# Altium PCB opo_v4.1.PcbDoc (part 2 of 2)
Units mil, origin at the board's own origin, x right, y up, seen from the top; angles counter-clockwise.
Board outline 1250 x 1250 mil, 6 copper layers (Top Layer, GND, Mid-Layer 3, Mid-Layer 4, VCC, Bottom Layer), stack 72.01 mil thick; 106 components, 83 nets, 445 pads, 226 vias.
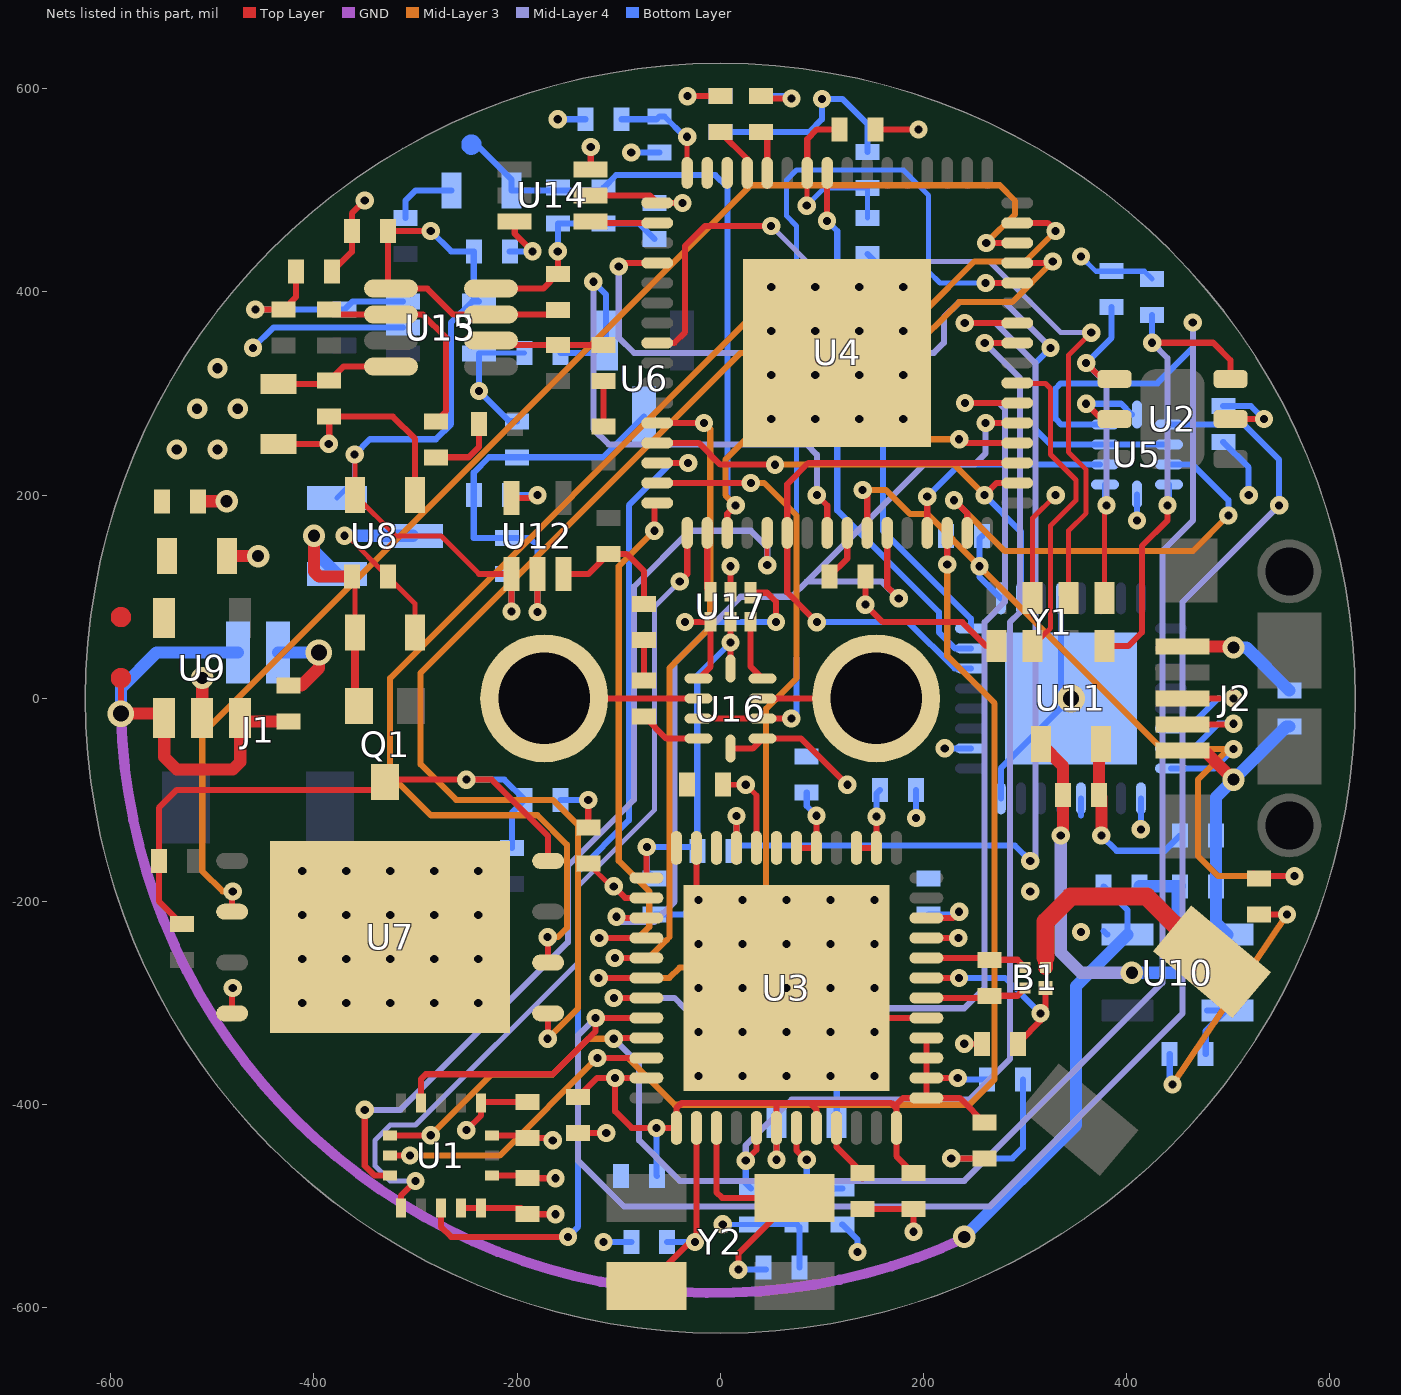
[diagram p6: the nets of this part, all layers, seen from the top]

## Via types
v1: diameter 18, hole 8, Top Layer to Bottom Layer, 149 vias
v2: diameter 19.68, hole 8.07, Top Layer to Bottom Layer, 61 vias
v3: diameter 22, hole 12, Top Layer to Bottom Layer, 8 vias
v4: diameter 20, hole 10, Top Layer to Bottom Layer, 5 vias
v5: diameter 26, hole 16, Top Layer to Bottom Layer, 2 vias
v6: diameter 27.56, hole 15.75, Top Layer to Bottom Layer, tented top, 1 vias

## Nets (pads, with @x,y where several pads share a name; then routed paths per layer and width w, separated by ;. In a path a pad name is that pad's centre, name@x,y a point inside that pad or via, vN(x,y) a via of type N, cw(c..) or ccw(c..) an arc to the next point about the centre after c; other vN are vias at no path point) (continued)
GND: C1.2 C2.2 C3.2 C4.2 C5.2 C6.2 C7.2 C8.2 C9.2 C10.2 C11.2 C12.2 C13.2 C14.2 C15.2 C16.2 C17.2 C18.2 C19.1 C20.1 C21.2 C22.2 C23.2 C24.2 C25.2 C26.2 C27.2 C28.2 C29.2 C30.2 C31.2 C32.2 C33.2 C34.2 C35.2 C39.2 C40.2 C41.2 C42.2 C43.2 C44.2 C45.2 C46.2 C47.2 J1.1 J2.5 R5.1 R9.2 R25.2 R26.2 U1.12 U1.13 U1.16 U2.2 U3.5 U3.9 U3.19 U3.22 U3.23 U3.24 U3.49 U4.62 U4.63 U4.65 U5.10 U6.3 U7.4 U7.9 U8.3 U9.2 U10.2 U11.4 U11.17 U11.20 U11.24 U11.26 U11.33 U12.2 U13.4 U14.3 U14.6 U15.2 U16.1 U16.10 U17.2 Y1.3 | length 4149.4
  Top Layer w5: v1(-370,160) -367.28,160 C25.2@-327.28,120 -300.47,93.19 C24.2@-300.47,65 ; Y1.3@307.28,98.62 307.28,177.28 v1(330,200)
  Top Layer w6: U7.4@-480.51,-310 -480.51,-285.51 v1(-480,-285) ; C41.2@-435,250.47 v1(-385.47,250.47) -385,250.94 C40.2@-385,277.28 -322.28,277.28 -300.47,255.47 C26.2@-300.47,200 ; R25.2@-382.28,420 -362.72,439.57 C45.2@-362.72,460 -362.72,477.28 v1(-350,490) ; U1.12@-255.31,-501.67 U1.13@-235.62,-501.67 C2.2@-196.04,-501.67 ; U13.4@-225.79,403.39 -174.33,403.39 C44.2@-160,417.72 v1(-160,440) ; U1.16@-224.8,-430.31 C1.2@-192.41,-430.31 ; U14.6@-202.4,469.41 -202.4,457.4 v1(-185,440) ; C2.2@-190,-507.72 v1(-162.28,-507.72) ; C1.2@-190,-432.72 -167.28,-432.72 v1(-165,-435) ; v1(-180,85) U12.2@-180,122.6 ; C10.2@-145,-432.72 C10.2@-140,-427.72 v1(-112.28,-427.72) ; C9.2@-130,-127.28 v1(-130,-100) ; U14.3@-127.6,520.59 v1(-127.6,542.6) ; U3.23@-23.58,-147.2 -23.58,-196.42 v2(-21.61,-198.39) v2(21.69,-241.69) v2(65,-285) 94.53,-314.53 U3.5@202.8,-314.53 ; U16.10@10,-49.37 31.65,-49.37 U16.1@41.5,-39.53 79.53,-39.53 v1(125,-85) ; U17.2@10,104.76 v1(10,130) ; R5.1@140,-502.72 C17.2@190,-502.72 v1(190,-525) ; C21.2@152.72,560 v1(195,560) ; U3.9@202.8,-235.79 v1(234.21,-235.79) ; v1(227.28,-452.72) C18.2@260,-452.72 ; v1(240,-340) C22.2@257.28,-340 C22.2@257.28,-337.28 ; C32.2@310.47,-45 C32.2@312.97,-47.5 ; v1(360,290) 375,275 U2.2@387.91,275
  Top Layer w12: C29.2@-514.13,194 v3(-486,194) ; U9.2@-510,-19.21 v3(-510,20) ; C28.2@-485.47,140 v3(-455,140) ; C27.2@-425,12.72 -412.28,12.72 -395.12,29.88 v5(-395.12,45.12) ; C32.2@315.47,-45 337.28,-66.81 C34.2@337.28,-95 337.28,-132.72 v1(335,-135) ; J2.5@454.68,51.18 503.82,51.18 v3(505,50)
  Mid-Layer 4 w12: v1(335,-135) 335,-250 355,-270 v3(405,-270)
  Bottom Layer w5: v1(2.28,-517.72) R9.2@30,-517.72 C7.2@75,-517.72
  Bottom Layer w6: v3@-510.32,19.68 v3(-510,20) ; v1(-460,345) -440,365 U15.2@-312.4,365 ; C46.2@-207.28,440 v1(-185,440) ; v1(-180,85) -180,150 -187.72,157.72 C39.2@-210,157.72 -242.72,157.72 C42.2@-242.72,200 -242.72,222.28 -227.72,237.28 C43.2@-200,237.28 -115.31,237.28 U6.3@-75,277.6 ; v1(-160,440) C47.2@-160,467.28 R26.2@-115,467.28 -80,467.28 C4.2@-65,452.28 ; C23.2@-157.28,-100 v1(-130,-100) ; v1(-115,-535) C20.1@-87.72,-535 ; v1(-87.72,537.28) C5.2@-60,537.28 ; C6.2@-65,-212.72 -35.94,-212.72 v2(-21.61,-198.39) ; C7.2@75,-517.72 77.72,-520.43 C19.1@77.72,-560 ; v2(108.31,-371.61) 114.53,-377.83 C8.2@114.53,-415 ; v1(192.72,-117.72) C15.2@192.72,-90 ; v1(220.79,-49.21) U11.26@246.57,-49.21 ; v1(227.28,-452.72) 287.28,-452.72 297.72,-442.28 C13.2@297.72,-375 ; U11.24@276.1,-98.43 276.1,-68.9 v6(345,0) ; U11.33@335.16,9.84 U11.4@335.16,98.43 ; 354.84,-115.16 U11.20@354.84,-98.43 ; v1(360,290) 394.37,290 405,279.37 ; v1(413.9,-128.9) U11.17@413.9,-98.43 ; C3.2@495,252.28 520,227.28 v1(520,200)
  Bottom Layer w12: J1.1@-435.32,45.12 v5(-395.12,45.12) ; v1(-370,160) U8.3@-302.6,160 ; v3(405,-270) 465,-270 ; C31.2@412.72,-185 C30.2@452.28,-185 450,-187.28 450,-255 465,-270 ; U10.2@499.21,-270 465,-270 ; v3(505,50) 517.72,50 C33.2@560,7.72
  other v1: 355,-230 305,-190
  other v2: -21.61,-371.61 21.69,-371.61 65,-371.61 151.61,-371.61 -21.61,-328.31 21.69,-328.31 65,-328.31 108.31,-328.31 151.61,-328.31 -411.61,-299.96 -368.31,-299.96 -325,-299.96 -281.69,-299.96 -238.39,-299.96 -21.61,-285 21.69,-285 108.31,-285 151.61,-285 -411.61,-256.65 -368.31,-256.65 -325,-256.65 -281.69,-256.65 -238.39,-256.65 -21.61,-241.69 65,-241.69 108.31,-241.69 151.61,-241.69 -411.61,-213.35 -368.31,-213.35 -325,-213.35 -281.69,-213.35 -238.39,-213.35 21.69,-198.39 65,-198.39 108.31,-198.39 151.61,-198.39 -411.61,-170.04 -368.31,-170.04 -325,-170.04 -281.69,-170.04 -238.39,-170.04 50.04,275.04 93.35,275.04 136.65,275.04 179.96,275.04 50.04,318.35 93.35,318.35 136.65,318.35 179.96,318.35 50.04,361.65 93.35,361.65 136.65,361.65 179.96,361.65 50.04,404.96 93.35,404.96 136.65,404.96 179.96,404.96
I2C/SPI: U4.4 U5.2 U5.8 | length 813.5
  Top Layer w6: v1(-100,425) -96.42,428.58 U4.4@-62.17,428.58
  Mid-Layer 4 w6: v1(-100,425) -100,355 -85,340 210,340 220,350 220,375 235,390 280,390 v1(325,345)
  Bottom Layer w6: v1(325,345) 310,330 310,265 325.16,249.84 373.5,249.84 U5.2@436.5,249.84
INTEGRATOR: C47.1 D4.2 R26.1 U4.19 U4.36 | length 1007.4
  Top Layer w6: U4.19@6.73,162.83 6.73,181.73 v1(15,190) ; v1(235,255) 238.58,251.42 U4.36@292.17,251.42
  Mid-Layer 3 w6: v1(15,190) 5,200 5,235 25,255 v1(235,255)
  Bottom Layer w6: -240,545 -205.47,510.47 D4.2@-205.47,500 -117.72,500 R26.1@-115,502.72 -102.72,515 -5,515 7,503 7,198 v1(15,190)
  Bottom Layer w10: -240,545 ccw(c-245,545) -240,545
MISO0: U1.7 U3.34 U4.30 | length 1270
  Top Layer w6: U1.7@-325.2,-450 v1(-305.48,-450) ; v1(-121.1,-353.9) U3.34@-72.8,-353.9 ; v1(223.27,131.73) U4.30@223.27,162.83
  Mid-Layer 3 w6: v1(-305.48,-450) -217.2,-450 v1(-121.1,-353.9) -91.1,-353.9 -45,-400 245,-400 270,-375 270,-5 223.27,41.73 v1(223.27,131.73)
MISO1: U4.46 U7.2 | length 1307.3
  Top Layer w6: U7.2@-480.51,-210 -480.51,-190.51 v1(-480,-190) ; v1(261.73,448.27) U4.46@292.17,448.27
  Mid-Layer 3 w6: v1(-480,-190) -490,-190 -510,-170 -510,-35 30,505 275,505 290,490 290,476.54 v1(261.73,448.27)
MOSI0: U4.29 U5.7 | length 218.7
  Top Layer w6: U4.29@203.58,162.83 v1(203.58,198.58)
  Bottom Layer w6: v1(203.58,198.58) 235.16,230.16 U5.7@373.5,230.16
MOSI0_MUX: U1.6 U3.33 U5.9 | length 1934.7
  Top Layer w6: U1.6@-325.2,-430.31 -285.31,-430.31 v1(-285,-430) ; v1(-105,-335) -104.21,-334.21 U3.33@-72.8,-334.21
  Mid-Layer 3 w6: v1(-285,-430) -225,-370 -165,-370 -130,-335 v1(-105,-335)
  Mid-Layer 4 w6: v1(-105,-335) -80,-360 -80,-435 -40,-475 240,-475 435,-280 435,145 465,175 v1(465,370)
  Bottom Layer w6: U5.9@378.5,269.53 335.47,269.53 330,275 330,305 335,310 430,310 465,345 v1(465,370)
MOSI1: U4.45 U7.5 | length 1345.8
  Top Layer w6: v1(-170,-335) -169.49,-334.49 U7.5@-169.49,-310 ; U4.45@292.17,428.58 328.58,428.58 v1(327.17,430)
  Mid-Layer 3 w6: v1(-170,-335) -140,-305 -140,-125 -165,-100 -260,-100 -295,-65 -295,25 20,340 185,340 235,390 287.17,390 v1(327.17,430)
NetANT1_1: ANT1.1 B1.2 | length 253.8
  Top Layer w15: 320,-255 320.04,-255.04 B1.2@320.04,-264.96
  Top Layer w18.11: 320,-255 320,-220 345,-195 419.49,-195 ANT1.1@483.74,-259.26 ANT1.1@478,-265
NetC5_1: C5.1 FB1.2 U4.64 | length 109.6
  Top Layer w5: v1(-32.72,552.72) -32.64,552.64 U4.64@-32.64,517.17
  Bottom Layer w6: FB1.2@-97.28,570 -62.72,570 C5.1@-60,572.72 -55,572.72 -35,552.72 v1(-32.72,552.72)
NetC19_2: C19.2 U3.39 Y2.1 | length 251.4
  Top Layer w6: U3.39@-3.9,-434.49 -3.9,-486.1 1.69,-491.69 Y2.1@72.83,-491.69 17.72,-546.81 v1(17.72,-562.28)
  Bottom Layer w6: v1(17.72,-562.28) C19.2@45,-562.28
NetC20_2: C20.2 U3.38 Y2.3 | length 194.2
  Top Layer w6: Y2.3@-72.83,-578.31 -29.53,-535 v1(-25,-535) -23.58,-533.58 U3.38@-23.58,-434.49
  Bottom Layer w6: C20.2@-52.28,-535 v1(-25,-535)
NetC21_1: C21.1 R8.2 R10.2 U4.58 | length 198.2
  Top Layer w5: v1(85,485) 85.47,485.47 U4.58@85.47,517.17
  Top Layer w6: U4.58@85.47,517.17 85.47,550.47 95,560 C21.1@117.28,560
  Bottom Layer w5: v1(85,485) 102.28,502.28 R10.2@145,502.28 R8.2@145,472.72
NetC36_2: C36.2 R17.1 | length 69.1
  Top Layer w6: R17.1@-280,237.28 -247.72,237.28 -237.72,247.28 C36.2@-237.72,270
NetC37_2: C37.2 R19.1 | length 39.6
  Top Layer w6: C37.2@-75,17.72 R19.1@-75,57.28
NetC38_2: C38.2 R21.1 | length 44.6
  Top Layer w6: C38.2@-115,267.72 R21.1@-115,312.28
NetD1_1: D1.1 R6.1 | length 66.9
  Top Layer w6: D1.1@40,592.72 42.28,590.43 v1(70,590.43)
  Bottom Layer w6: R6.1@40,592.72 72.28,592.72 v1(70,590.43) v1@70,590
NetD1_2: D1.2 U4.60 | length 42.6
  Top Layer w6: D1.2@40,557.28 46.1,551.18 U4.60@46.1,517.17
NetD2_1: D2.1 R7.1 | length 64.6
  Top Layer w6: v1(-32.28,592.72) D2.1@0,592.72
  Bottom Layer w6: v1(-32.28,592.72) R7.1@0,592.72
NetD2_2: D2.2 U4.61 | length 51.1
  Top Layer w6: D2.2@0,557.28 26.42,530.87 U4.61@26.42,517.17
NetD3_2: D3.2 R15.1 | length 265.4
  Top Layer w6: D3.2@530,-212.72 v1(557.72,-212.72)
  Mid-Layer 3 w6: v1(445,-380) v1(557.72,-212.72)
  Bottom Layer w6: R15.1@442.28,-350 442.28,-377.72 440,-380 v1(445,-380)
NetD4_1: D4.1 R24.2 | length 66.9
  Bottom Layer w6: R24.2@-310,472.72 -310,490 -300,500 D4.1@-264.53,500
NetJ2_2: J2.2 U11.15 | length 122.2
  Top Layer w6: J2.2@454.68,-25.59 504.41,-25.59 v1(505,-25)
  Bottom Layer w6: U11.15@443.43,-49.21 465.79,-49.21 490,-25 v1(505,-25)
NetJ2_3: J2.3 U11.14 | length 124.1
  Top Layer w6: J2.3@454.68,0 v1(505,0)
  Bottom Layer w6: U11.14@443.43,-29.53 460.47,-29.53 490,0 v1(505,0)
NetR4_2: R4.2 U4.25 | length 53.6
  Top Layer w6: R4.2@107.28,115 R4.2@109.78,117.5 ; R4.2@107.28,120 124.84,137.56 U4.25@124.84,162.83
NetR5_2: R5.2 U3.45 | length 58.7
  Top Layer w6: U3.45@114.21,-422.8 114.21,-441.5 R5.2@140,-467.28 ; R5.2@137.5,-469.78 R5.2@140,-472.28
NetR15_2: R15.2 U10.3 | length 69.2
  Bottom Layer w6: R15.2@477.72,-350 477.72,-327.28 497.6,-307.4 U10.3@479.21,-307.4
NetR16_1: R16.1 R19.2 U12.3 | length 127
  Top Layer w6: U12.3@-154.41,122.6 -129.69,122.6 R16.1@-110,142.28 -92.28,142.28 -75,125 R19.2@-75,92.72
NetR17_2: R17.2 R20.2 U13.6 | length 212.9
  Top Layer w6: R20.2@-385,382.72 -380.08,377.8 U13.6@-324.21,377.8 -292.8,377.8 -270,355 -270,282.72 R17.2@-280,272.72
NetR18_2: R18.2 R21.2 U13.2 | length 106.3
  Top Layer w6: U13.2@-221.3,347.72 R18.2@-160,347.72 R21.2@-115,347.72
NetR22_1: R22.1 R23.2 R25.1 U15.3 | length 218.7
  Top Layer w6: v1(-457.72,382.72) R23.2@-430,382.72 -417.72,395 R25.1@-417.72,420
  Bottom Layer w6: v1(-457.72,382.72) R22.1@-370,382.72 -362.13,390.59 U15.3@-312.4,390.59
NetU1_8: U1.8 U4.21 | length 939.2
  Top Layer w5: v1(46.1,131.1) U4.21@46.1,162.83
  Top Layer w6: v1(-350,-405) -350,-460 -340.31,-469.69 U1.8@-325.2,-469.69
  Mid-Layer 4 w6: v1(-350,-405) -315,-405 -150,-240 -150,-165 -85,-100 -85,110 -30,165 30,165 46.1,148.9 v1(46.1,131.1)
NetU1_9: U1.9 U4.17 | length 843.6
  Top Layer w6: U1.9@-314.38,-501.67 -314.38,-489.38 v1(-300,-475) ; v1(-40,115) -32.64,122.36 U4.17@-32.64,162.83
  Mid-Layer 4 w5: v1(-300,-475) -325,-475 -340,-460 -340,-435 -325,-420 -300,-420 -139.5,-259.5 -139.5,-184.5 -65,-110 -65,90 v1(-40,115)
NetU1_11: U1.11 U4.14 | length 998.3
  Top Layer w6: U1.11@-275,-501.67 -275,-520 -265,-530 v1(-150,-530) ; U4.14@-62.17,231.73 v1(-31.73,231.73)
  Bottom Layer w6: v1(-150,-530) -140,-520 -140,-170 -90,-120 -90,190 -48.27,231.73 v1(-31.73,231.73)
NetU4_2: U4.2 U14.1 | length 64
  Top Layer w6: U14.1@-126.14,467.95 U4.2@-62.17,467.95
NetU4_8: U4.8 Y1.2 | length 853.1
  Top Layer w5: Y1.2@342.72,98.62 342.72,165 360,182.28 360,225 342.72,242.28 342.72,337.72 v1(365,360)
  Top Layer w6: U4.8@-62.17,349.84 -45.16,349.84 -35,360 -35,445 -15,465 v1(50,465)
  Mid-Layer 4 w5: v1(50,465) 85,430 265,430 335,360 v1(365,360)
NetU4_18: U4.18 U17.3 | length 59.4
  Top Layer w6: U4.18@-12.95,162.83 -12.95,108.03 U17.3@-9.68,104.76
NetU4_39: U4.39 Y1.6 | length 316.8
  Top Layer w5: U4.39@292.17,310.47 292.64,310 320,310 325,305 325,240 350,215 350,195 325,170 325,69.09 Y1.6@307.28,51.38
NetU4_44: U4.44 U16.2 U16.8 | length 948.7
  Top Layer w6: U16.8@-21.5,-19.84 U16.2@41.5,-19.84 v1(69.84,-19.84) ; v1(261.1,408.9) U4.44@292.17,408.9
  Bottom Layer w5: 75,40 75,465 65,475 65,510 75,520 180,520 205,495 205,420 216.1,408.9 v1(261.1,408.9)
  Bottom Layer w6: v1(69.84,-19.84) 75,-14.68 75,40
NetU16_3: U16.3 UT1.2 | length 112
  Top Layer w6: U16.3@41.5,-0.16 153.23,-0.16 UT1.2@153.39,0
NetU16_7: U16.7 UT1.1 | length 151.7
  Top Layer w6: UT1.1@-173.23,-0.16 U16.7@-21.5,-0.16
ONEWIRE: R11.2 U4.24 U6.1 | length 569.6
  Top Layer w6: v1(95,200) 105.16,189.84 U4.24@105.16,162.83
  Mid-Layer 4 w6: v1(-125,410) -125,265 -110,250 85,250 95,240 v1(95,200)
  Bottom Layer w6: R11.2@-157.28,340 -124.8,340 U6.1@-112.4,352.4 -112.4,397.4 v1(-125,410)
OP1_NEGIN: C37.1 U16.9 | length 62.5
  Top Layer w6: C37.1@-75,-17.72 -53.19,-39.53 U16.9@-21.5,-39.53
R\A\D\I\O\_\C\S\: U3.31 U4.38 | length 1080.7
  Top Layer w6: v1(-104.84,-294.84) U3.31@-72.8,-294.84 ; v1(240.79,290.79) U4.38@292.17,290.79
  Mid-Layer 4 w6: v1(-104.84,-294.84) -45.16,-294.84 -35,-305 240,-305 260,-285 260,75 280,95 280,285 274.21,290.79 v1(240.79,290.79)
R\A\D\I\O\_\R\E\S\E\T\: R3.1 U3.21 U4.42 | length 988.4
  Top Layer w6: U3.21@15.79,-147.2 v1(15.79,-115.79) ; v1(240.47,369.53) U4.42@292.17,369.53
  Mid-Layer 4 w6: v1(240.47,369.53) 270.47,369.53 310,330 310,-155 v1(305,-160)
  Bottom Layer w6: v1(15.79,-115.79) 15.79,-146.93 17.72,-145 290,-145 v1(305,-160)
R\S\T\/NMI: R8.1 U11.32 | length 410.5
  Bottom Layer w6: R8.1@145,437.28 160,422.28 160,165 246.57,78.43 U11.32@246.57,68.9
RADIO_CCA: U3.28 U4.16 | length 545.6
  Top Layer w6: v1(-119.21,-235.79) U3.28@-72.8,-235.79 ; v1(-65,165) -65,189.53 U4.16@-62.17,192.36
  Mid-Layer 3 w6: v1(-119.21,-235.79) -80.79,-235.79 -70,-225 -70,-190 -100,-160 -100,130 v1(-65,165)
RADIO_FIFO: U3.30 U4.15 | length 815.2
  Top Layer w6: v1(-119.84,-275.16) U3.30@-72.8,-275.16 ; U4.15@-62.17,212.05 v1(30,212.05)
  Mid-Layer 3 w6: v1(-119.84,-275.16) -50.16,-275.16 -40,-265 30,-265 45,-250 45,-10 75,20 75,180 42.95,212.05 v1(30,212.05)
RADIO_FIFOP: U3.29 U4.12 | length 665.4
  Top Layer w6: v1@-104.53,-255.47 v1(-103.89,-255.47) U3.29@-72.8,-255.47 ; U4.12@-62.17,271.1 v1(-16.1,271.1)
  Mid-Layer 3 w5: -52.74,-237.74 -50,-235
  Mid-Layer 3 w6: v1(-103.89,-255.47) -70.47,-255.47 -52.74,-237.74 ; -50,-235 -50,30 -10,70 -10,265 v1(-16.1,271.1)
RADIO_SFD: U3.27 U4.27 U4.37 | length 951.5
  Top Layer w6: v1(-102.2,-215) -101.1,-216.1 U3.27@-72.8,-216.1 ; U4.27@164.21,162.83 164.21,109.8 v1(175.59,98.43) ; v1(261.1,271.1) U4.37@292.17,271.1
  Mid-Layer 4 w6: v1(-102.2,-215) -97.2,-220 -65,-220 -45,-200 -45,35 20,100 70,100 85,115 ; v1(175.59,98.43) 159.02,115 85,115 ; v1(261.1,271.1) 261.1,241.1 250,230 200,230 85,115
RADIO_VREG_EN: R9.1 U3.41 U4.41 | length 1131.5
  Top Layer w6: v1(25,-455) 35.47,-444.53 U3.41@35.47,-422.8 ; v1(260.16,349.84) U4.41@292.17,349.84
  Mid-Layer 4 w6: v1(25,-455) 25,-440 70,-395 245,-395 285,-355 285,75 295,85 295,315 v1(260.16,349.84)
  Bottom Layer w6: v1(25,-455) 25,-477.28 R9.1@30,-482.28
RF_N: B1.3 L1.1 U3.8 | length 98.6
  Top Layer w6: U3.8@202.8,-255.47 L1.1@263.19,-255.47 ; L1.1@265,-257.28 292.28,-257.28 B1.3@299.96,-264.96
RF_P: B1.4 L1.2 U3.6 | length 98.3
  Top Layer w6: U3.6@202.8,-294.84 L1.2@262.87,-294.84 ; L1.2@265,-292.72 292.28,-292.72 B1.4@299.96,-285.04
SCL: R2.2 U2.6 U5.4 Y1.8 | length 501.6
  Top Layer w6: Y1.8@378.15,51.38 401.38,51.38 415,65 415,150 440,175 v1(440,190) ; v1(425,350) 485,350 502.09,332.91 U2.6@502.09,314.37 U2.6@495.63,314.37
  Mid-Layer 4 w6: v1(425,350) 440,335 v1(440,190)
  Bottom Layer w6: v1(425,350) R2.2@425,377.28 ; v1(440,190) 441.5,191.5 U5.4@441.5,210.47
SCLK0: U4.31 U5.3 | length 430.8
  Top Layer w6: v1(230,195) 242.95,182.05 U4.31@242.95,162.83
  Mid-Layer 3 w6: v1(230,195) 280,145 465,145 v1(500,180)
  Bottom Layer w6: U5.3@441.5,230.16 464.84,230.16 500,195 v1(500,180)
SCLK0_MUX: U1.4 U3.32 U5.1 | length 1825.3
  Top Layer w6: U1.4@-294.69,-398.33 -294.69,-374.69 -290,-370 -165,-370 -122.76,-327.76 v1(-122.76,-314.53) U3.32@-72.8,-314.53
  Mid-Layer 4 w6: v1(-122.76,-314.53) -140,-331.77 -140,-455 -95,-500 265,-500 455,-310 455,95 v1(550,190)
  Bottom Layer w6: U5.1@441.5,269.53 515.47,269.53 550,235 v1(550,190)
SCLK1: U4.47 U7.6 | length 1305.9
  Top Layer w6: v1(-170,-235) -169.49,-235.51 U7.6@-169.49,-260 ; U4.47@292.17,467.95 322.05,467.95 v1(330,460)
  Mid-Layer 3 w6: v1(-170,-235) -160,-235 -151,-226 -151,-144 -180,-115 -285,-115 -325,-75 -325,20 35,380 200,380 250,430 300,430 v1(330,460)
SDA: R1.2 U2.1 U5.6 Y1.1 | length 361.3
  Top Layer w5: Y1.1@378.15,98.62 378.15,186.01 380,187.86 v1(380,190)
  Top Layer w6: v1(360,330) 375.63,314.37 U2.1@387.91,314.37
  Mid-Layer 4 w6: v1(360,330) 380,310 v1(380,190)
  Bottom Layer w6: v1(360,330) 385,355 R1.2@385,385 ; U5.6@378.5,210.47 378.5,191.5 v1(380,190)
TCK: U4.57 U11.31 | length 535.9
  Top Layer w6: v1(105,470) 105,517.01 U4.57@105.16,517.17
  Bottom Layer w6: v1(105,470) 115,460 115,185 215,85 215,65 230.79,49.21 U11.31@246.57,49.21
TX_1: U16.4 U17.6 | length 60.6
  Top Layer w6: U17.6@29.68,75.24 29.68,31.34 U16.4@41.5,19.53
TX_2: U16.6 U17.1 U17.4 | length 223.9
  Top Layer w6: v1(-34.76,75.24) U17.4@-9.68,75.24 -9.68,31.34 U16.6@-21.5,19.53 ; U17.1@29.68,103.98 46.02,103.98 54.76,95.24 v1(54.76,75.24)
  Bottom Layer w6: v1(-34.76,75.24) v1(54.76,75.24)
TXRX_SWITCH: B1.1 C22.1 U3.7 | length 189.3
  Top Layer w6: U3.7@202.8,-275.16 v1(234.84,-275.16) ; C22.1@295,-337.28 315,-317.28 v1(315,-310) 320,-305 B1.1@320.04,-285.04
  Bottom Layer w6: v1(234.84,-275.16) 280.16,-275.16 v1(315,-310)
UART1_RX: U4.22 U4.35 U11.30 | length 553.4
  Top Layer w6: v1(95,75) 65.79,104.21 U4.22@65.79,162.83 65.79,210.79 86.73,231.73 U4.35@292.17,231.73
  Bottom Layer w6: v1(95,75) 185,75 230.47,29.53 U11.30@246.57,29.53
UART1_TX: U4.13 U4.34 U11.2 | length 497
  Top Layer w6: U4.13@-62.17,251.42 -21.42,251.42 0,230 v1(53.86,230) ; v1(260,200) 272.05,212.05 U4.34@292.17,212.05
  Mid-Layer 3 w6: v1(53.86,230) 230,230 v1(260,200)
  Bottom Layer w6: v1(260,200) 295.79,164.21 U11.2@295.79,98.43
VBAT: C27.1 C31.1 J1.2 U9.1 U9.3 U10.5 | length 2068.4
  Top Layer w6: v5(-590,-15) -590,15 -585,20
  Top Layer w10: -585,20 ccw(c-590,20) -585,20
  Top Layer w12: v5(-590,-15) U9.1@-551.61,-15 ; U9.1@-547.4,-19.21 -547.4,-57.6 -535,-70 -480,-70 -472.6,-62.6 U9.3@-472.6,-19.21 -469.09,-22.72 C27.1@-425,-22.72
  GND w10: v5(-590,-15) ccw(c-5,0) v3@242.15,-530.44
  GND w12: v5(-590,-15) v5@-584.95,-20.05
  Bottom Layer w6: U10.5@377.28,-229.09 U10.5@380.79,-232.6 ; C31.1@377.28,-185 400.79,-208.5 U10.5@400.79,-232.6
  Bottom Layer w12: v5(-590,-15) -590,10 -554.88,45.12 J1.2@-474.68,45.12 ; v3(240,-530) 350,-420 350,-283.39 U10.5@400.79,-232.6
VBUS: C30.1 C33.1 FB3.2 J2.1 U10.1 | length 303.4
  Top Layer w12: J2.1@454.68,-51.18 476.18,-51.18 v3(505,-80)
  Bottom Layer w12: U10.1@499.21,-232.6 487.72,-221.1 C30.1@487.72,-185 FB3.2@487.72,-135 487.72,-97.28 v3(505,-80) 557.28,-27.72 C33.1@560,-27.72
VCC3.3: C1.1 C2.1 C3.1 C4.1 C6.1 C24.1 C25.1 C28.1 C29.1 C40.1 C41.1 C42.1 C43.1 FB1.1 FB2.1 Q1.2 R1.1 R2.1 R3.2 R4.1 R6.2 R7.2 R10.1 R11.1 U1.1 U1.14 U2.5 U3.25 U4.1 U5.5 U8.1 U9.5 U12.5 U13.8 U14.2 U15.5 U16.5 U17.5 Y1.5 | length 1839.5
  Top Layer w5: C25.1@-362.72,120 -359.53,116.81 C24.1@-359.53,65
  Top Layer w6: C41.1@-435,309.53 C40.1@-388.19,309.53 ; C40.1@-385,312.72 -371.1,326.61 U13.8@-324.21,326.61 ; v1(-250,-425) -235.62,-410.62 U1.1@-235.62,-398.33 ; U1.1@-234.58,-397.28 C1.1@-190,-397.28 C1.1@-192.28,-395 ; U1.14@-224.8,-469.69 C2.1@-192.59,-469.69 ; U12.5@-205.59,197.4 -182.6,197.4 v1(-180,200) ; C2.1@-190,-472.28 v1(-162.28,-472.28) ; U14.2@-127.6,495 -69.53,495 U4.1@-62.17,487.64 v1(-37.36,487.64) ; U3.25@-72.8,-176.73 -72.8,-146.69 v1(-72.35,-146.25) ; U16.5@10,29.37 v1(10,55) U17.5@10,75.24 ; R4.1@142.72,120 v1(142.72,92.28) 160,75 238.23,75 261.85,51.38 ; U2.5@502.09,275 v1(535,275)
  Top Layer w8: C24.1@-359.53,65 -359.53,-3.66 Q1.2@-355.59,-7.6
  Top Layer w10: -585,80 ccw(c-590,80) -585,80
  Top Layer w12: v3(-400,160) -400,125 -395,120 C25.1@-362.72,120
  Bottom Layer w5: U15.5@-237.6,339.41 -237.01,340 R11.1@-192.72,340 ; v1(355,435) 369.57,420.43 R1.1@385,420.43 417.28,420.43 R2.1@425,412.72
  Bottom Layer w6: U15.5@-237.6,339.41 v1(-237.6,302.6) -207.72,272.72 C43.1@-200,272.72 ; C42.1@-207.28,200 v1(-180,200) ; v1(-160,570) FB1.1@-132.72,570 ; C6.1@-65,-177.28 -72.35,-169.93 v1(-72.35,-146.25) -26.46,-146.25 R3.2@-22.72,-150 -22.72,22.28 v1(10,55) ; C4.1@-65,487.72 -64.92,487.64 v1(-37.36,487.64) ; R7.2@0,557.28 R6.2@40,557.28 87.28,557.28 100,570 v1(100,590) 120,590 145,565 R10.1@145,537.72 ; FB2.1@120,-517.72 135,-532.72 v1(135,-545) ; v1(410,175) U5.5@410,200.63 ; C3.1@495,287.72 522.28,287.72 v1(535,275)
  Bottom Layer w12: v3(-400,160) -400,145.2 U8.1@-377.4,122.6
  other v4: -535,245 -495,245 -515,285 -475,285 -495,325
VCC3.3_USB: C35.1 D3.1 U4.26 U11.1 U11.16 | length 917.3
  Top Layer w6: v1(140,205) 144.53,200.47 U4.26@144.53,162.83 ; D3.1@525,-172.28 527.72,-175 v1(565,-175)
  Mid-Layer 3 w6: v1(140,205) 163.17,205 186.58,181.58 203.42,181.58 v1(255,130) 435,-50 v1@500,-50 ; v1(505,-50) v1@500,-50 ; v1(565,-175) 490,-175 470,-155 470,-80 v1@500,-50
  Bottom Layer w6: C35.1@257.72,160 255,157.28 v1(255,130) 255,119.53 U11.1@276.1,98.43 ; U11.16@443.43,-68.9 486.1,-68.9 v1(505,-50)
VCC_GATE: C23.1 Q1.3 R12.2 R13.2 R14.2 U7.8 | length 684.1
  Top Layer w6: R13.2@-530,-222.28 -552.72,-199.57 R14.2@-552.72,-160 -552.72,-107.72 -535,-90 -337.6,-90 Q1.3@-330,-82.4 -327.6,-80 v1(-250,-80) -225,-80 -169.49,-135.51 U7.8@-169.49,-160
  Bottom Layer w6: v1(-250,-80) -212.72,-80 C23.1@-192.72,-100 -205,-112.28 R12.2@-205,-147.28
VDD1.8: C8.1 C9.1 C10.1 C11.1 C12.1 C13.1 C14.1 C15.1 C16.1 C17.1 C18.1 U3.1 U3.2 U3.3 U3.4 U3.10 U3.14 U3.15 U3.17 U3.18 U3.20 U3.26 U3.35 U3.37 U3.42 U3.44 U3.48 | length 1267.5
  Top Layer w5: C9.1@-130,-162.72 -107.72,-185 v1(-105,-185) ; C11.1@2.72,-85 v1(25,-85) 35.47,-95.47
  Top Layer w6: C10.1@-140,-392.28 -121.3,-373.58 v1(-103.58,-373.58) ; v1(-105,-185) -93.58,-196.42 U3.26@-72.8,-196.42 U3.26@-71.38,-195 ; U3.35@-72.8,-373.58 v1(-103.58,-373.58) ; U3.20@35.47,-147.2 35.47,-95.47 ; v1@55.16,-454.84 v1(55.16,-454.07) U3.42@55.16,-422.8 55.16,-399.84 56.94,-398.06 ; U3.18@74.84,-147.2 U3.17@94.53,-147.2 v1(94.53,-115.47) ; U3.44@94.53,-422.8 94.53,-404.53 88.06,-398.06 ; U3.15@133.9,-147.2 U3.14@153.58,-147.2 v1(153.58,-116.42) ; C17.1@190,-467.28 173.27,-450.55 U3.48@173.27,-422.8 173.27,-403.27 ; U3.4@202.8,-334.21 U3.3@202.8,-353.9 U3.2@202.8,-373.58 ; U3.10@202.8,-216.1 228.9,-216.1 v1(235,-210) ; v1(233.58,-373.58) U3.2@202.8,-373.58 ; C18.1@262.28,-420 235.55,-393.27 U3.1@202.8,-393.27 ; v1(-103.58,-373.58) -103.58,-406.42 -87.2,-422.8 v1(-62.8,-422.8) U3.37@-43.27,-422.8 -43.27,-403.27 -38.06,-398.06 56.94,-398.06 ; 56.94,-398.06 88.06,-398.06 ; 88.06,-398.06 168.06,-398.06 173.27,-403.27 ; 173.27,-403.27 173.27,-399.8 179.8,-393.27 U3.1@202.8,-393.27 ; U3.1@202.8,-393.27 U3.2@202.8,-373.58
  Bottom Layer w6: v1(-62.8,-422.8) -62.8,-469.49 C16.1@-62.28,-470 ; v1(55.16,-454.07) 55.16,-415.31 C8.1@55.47,-415 ; C12.1@85,-92.72 85,-105.94 v1(94.53,-115.47) ; v1(153.58,-116.42) 153.58,-93.7 C15.1@157.28,-90 ; C14.1@205,-212.72 232.28,-212.72 v1(235,-210) ; v1(233.58,-373.58) 235,-375 C13.1@262.28,-375
VREF: C26.1 C39.1 C44.1 C45.1 C46.1 U8.2 U12.1 U13.3 U13.5 U15.4 | length 967.5
  Top Layer w5: v1(-360,240) -359.53,239.53 C26.1@-359.53,200 -319.53,160 -275,160 -237.6,122.6
  Top Layer w6: v1(-285,460) C45.1@-327.28,460 -327.28,406.46 U13.5@-324.21,403.39 -288.39,403.39 -262.8,377.8 U13.3@-225.79,377.8 C44.1@-164.49,377.8 ; -237.6,122.6 U12.1@-205.59,122.6 v1(-205.59,85.59)
  Bottom Layer w5: U8.2@-377.4,197.4 -360,214.8 v1(-360,240)
  Bottom Layer w6: v1(-360,240) -345,255 -280,255 -265,270 -265,370 -244.41,390.59 U15.4@-237.6,390.59 -242.72,395.71 C46.1@-242.72,440 -265,440 v1(-285,460) ; C39.1@-210,122.28 -205.59,117.87 v1(-205.59,85.59)
VREG_IN: C7.1 FB2.2 U3.43 | length 114.7
  Top Layer w6: U3.43@74.84,-422.8 74.84,-444.84 85,-455 v1(85,-454.07)
  Bottom Layer w6: v1(85,-454.07) 85,-472.28 C7.1@75,-482.28 FB2.2@120,-482.28
VUSB: C32.1 C34.1 FB3.1 U11.19 | length 218.2
  Top Layer w12: C32.1@374.53,-45 372.72,-46.81 C34.1@372.72,-95 375,-97.28 v1(375,-135)
  Bottom Layer w6: U11.19@374.53,-98.43 374.53,-134.53 v1(375,-135) 390,-150 437.28,-150 FB3.1@452.28,-135
pads on no net: ANT1. J1. J2.4 J2.6 U1.2 U1.3 U1.5 U1.10 U1.15 U2.3 U2.4 U2.7 U3.11 U3.12 U3.13 U3.16 U3.36 U3.40 U3.46 U3.47 U4.5 U4.6 U4.7 U4.9 U4.10 U4.11 U4.20 U4.23 U4.28 U4.32 U4.33 U4.43 U4.51 U4.52 U4.53 U4.54 U4.55 U4.56 U9.4 U10.4 U11.3 U11.5 U11.6 U11.7 U11.8 U11.9 U11.10 U11.11 U11.12 U11.13 U11.18 U11.21 U11.22 U11.23 U11.25 U11.27 U11.28 U11.29 Y1.4 Y1.7 Y2.2 Y2.4

## Polygon pours and split planes (outlines as drawn)
GND on Bottom Layer "Bottom Layer-No Net" (solid, pour order 14): -126.22,612.65 -126.22,97.65 383.78,97.65 383.78,487.65 333.78,522.65 293.78,547.65 243.78,572.65 188.78,592.65 133.78,607.65 78.78,617.65 -6.22,622.65
GND on Bottom Layer "Bottom Layer-No Net" (solid, pour order 12): -150,-65 -150,-610 -55,-625 30,-625 400.79,-220 400,-65
GND on GND "GND-No Net" (solid, pour order 15): -627.37,0.61 ccw(c-2.37,0.61) -2.37,-624.39 ccw(c-2.37,0.61) 622.63,0.61 ccw(c-2.37,0.61) -2.37,625.61 ccw(c-2.37,0.61)
GND on Top Layer "Bottom Layer-No Net" (solid, pour order 11): -150,-65 -150,-610 -55,-625 30,-625 400.79,-220 400,-65
VCC3.3 on Top Layer "Bottom Layer-No Net" (solid, pour order 16): -430.45,45 -610,45 -612.88,53.74 -610.36,74.97 -607.85,96.2 -598.43,143.56 -591.87,166.8 -585.32,190.04 -576.96,212.69 -568.61,235.34 -558.5,257.27 -548.39,279.19 -536.59,300.26 -524.8,321.32 -511.38,341.4 -497.97,361.47 -484.76,378.24 -471.54,395 -430.45,395
GND on Top Layer "Bottom Layer-No Net" (solid, pour order 13): -123.12,591.83 -123.12,76.83 386.88,76.83 386.88,466.83 336.88,501.83 296.88,526.83 246.88,551.83 191.88,571.83 136.88,586.83 81.88,596.83 -3.12,601.83
VCC3.3 on VCC "Bottom Layer-No Net" (solid, pour order 10): -630.33,-2.23 ccw(c-5.33,-2.23) -5.33,-627.23 ccw(c-5.33,-2.23) 619.67,-2.23 ccw(c-5.33,-2.23) -5.33,622.77 ccw(c-5.33,-2.23)
VDD1.8 on VCC "Bottom Layer-No Net" (solid, pour order 9): -155,-65 -155,-470 265,-470 265,-65 -20,-65 -20,-175 -95,-175 -95,-65

## Keep-outs
Keep-Out Layer:
  circle w10: c0,0 r625

## Other copper
GND:
  pour cut-out: 234.45,-411 370,-540 620,-240 460,-145
VCC:
  pour cut-out: 234.45,-411 370,-540 620,-240 460,-145

## Silkscreen, mask and mechanical layers (free items; w line width, h text height)
Top Overlay:
  circle w10: c385,350 r5
  region: -120.34,-106.68 -92.94,-106.68 -92.94,-92.06 -98.52,-92.06 -98.52,-78.82 -84.93,-97.86 -84,-97.86 -70.19,-78.82 -70.19,-92.06 -75.76,-92.06 -75.76,-106.68 -48.37,-106.68 -48.37,-92.06 -53.94,-92.06 -53.94,-70 -48.37,-70 -48.37,-55.37 -70.07,-55.37 -84,-74.64 -84.7,-74.64 -98.63,-55.37 -120.34,-55.37 -120.34,-70 -115,-70 -115,-92.06 -120.34,-92.06
  text "CH" at 550,-170 h30 r270
Bottom Overlay:
  region: 59.65,-51.43 10.14,-51.43 10.14,-25 20.21,-25 20.21,-1.08 -4.34,-35.49 -6.01,-35.49 -30.98,-1.08 -30.98,-25 -20.91,-25 -20.91,-51.43 -70.42,-51.43 -70.42,-25 -60.35,-25 -60.35,14.86 -70.42,14.86 -70.42,41.29 -31.19,41.29 -6.01,6.47 -4.76,6.47 20.42,41.29 59.65,41.29 59.65,14.86 50,14.86 50,-25 59.65,-25
  text "+" at -470,-175 h30
  text "OPO v4.1" at -180,-370 h30
  text "02/06/14" at -180,-420 h30
  text "YSK, WH" at -180,-470 h30